# Altium PCB HYDRA_V4_LINK.PcbDoc
Units mm, origin at the board's own origin, x right, y up, seen from the top; angles counter-clockwise.
Board outline 50.1 x 45.1 mm, 4 copper layers (TOP SIG, PWR + INT SIG, GND, BOTTOM SIG), stack 1.586 mm thick; 83 components, 114 nets, 317 pads, 40 vias.
Unrouted connection lines stored in the file: 161.
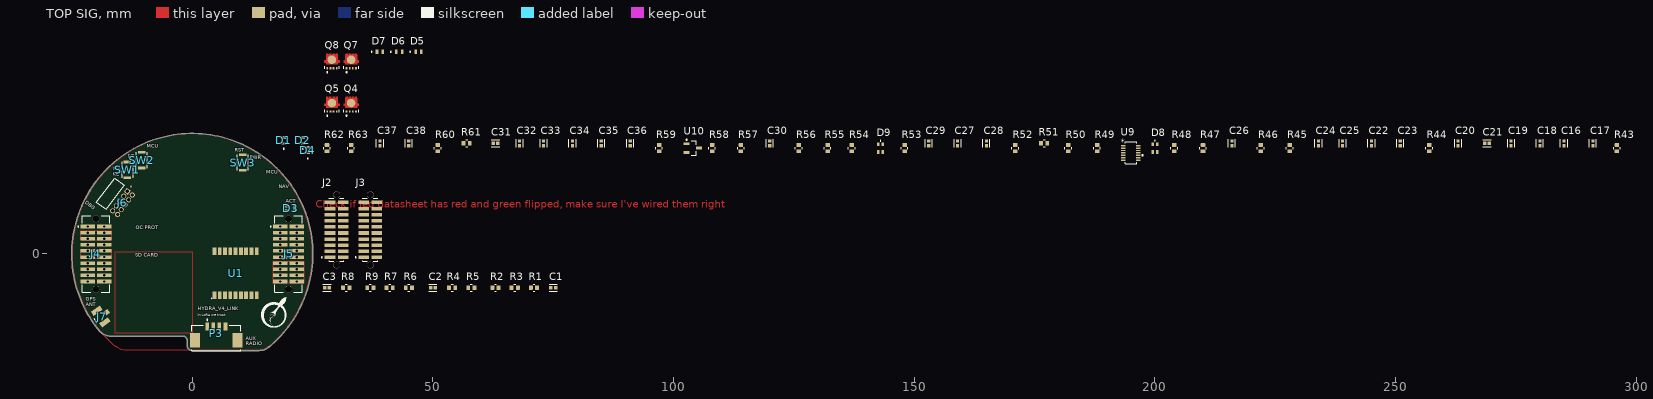
[diagram p0: TOP SIG view]
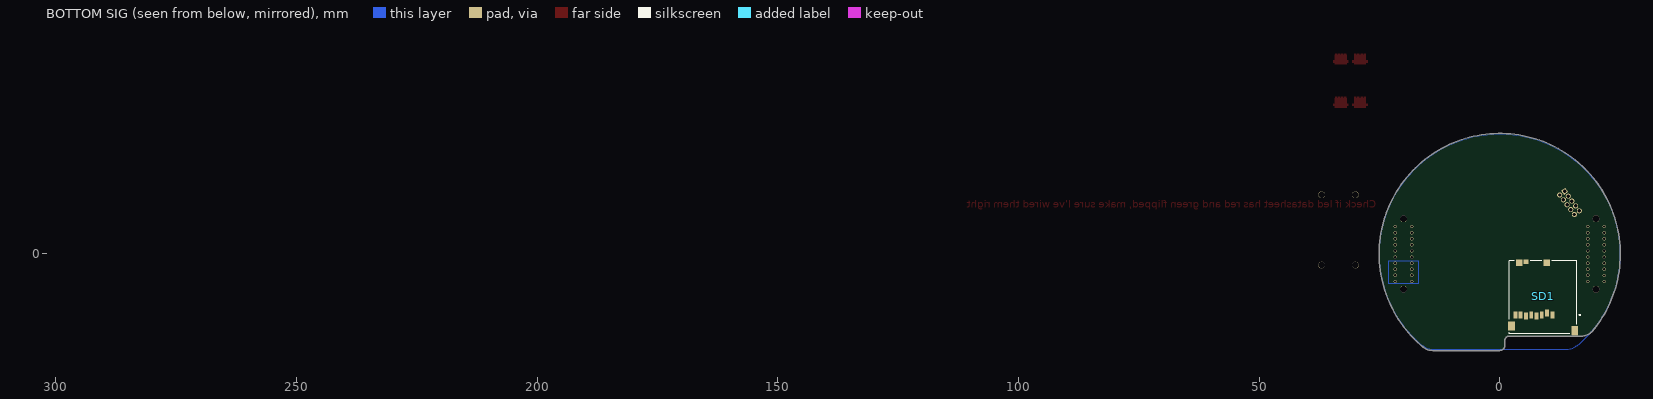
[diagram p1: BOTTOM SIG view, seen from below]
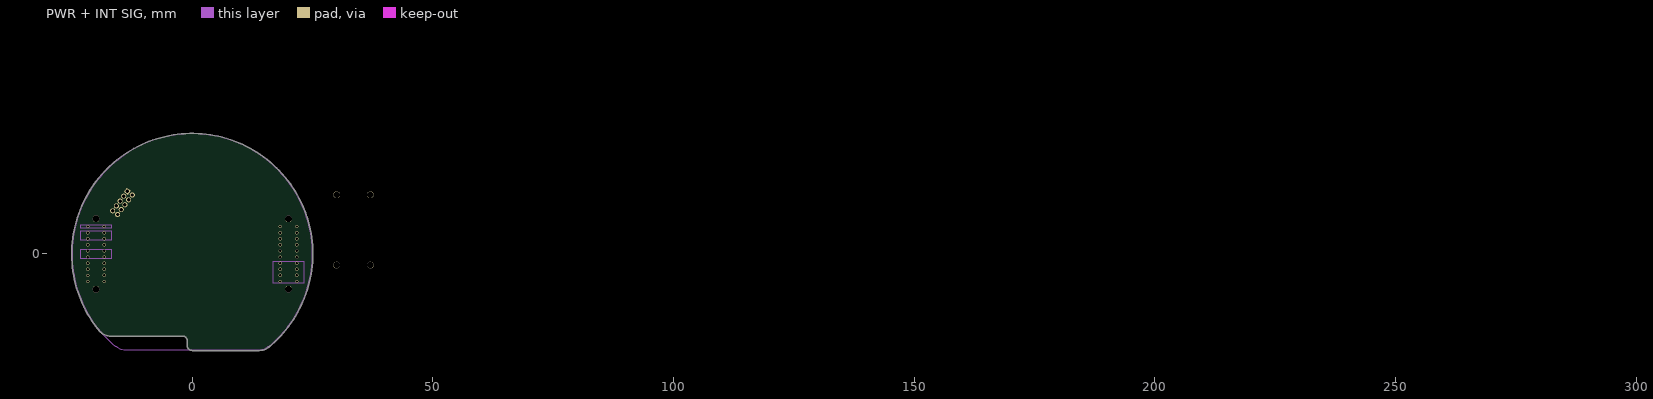
[diagram p2: PWR + INT SIG]
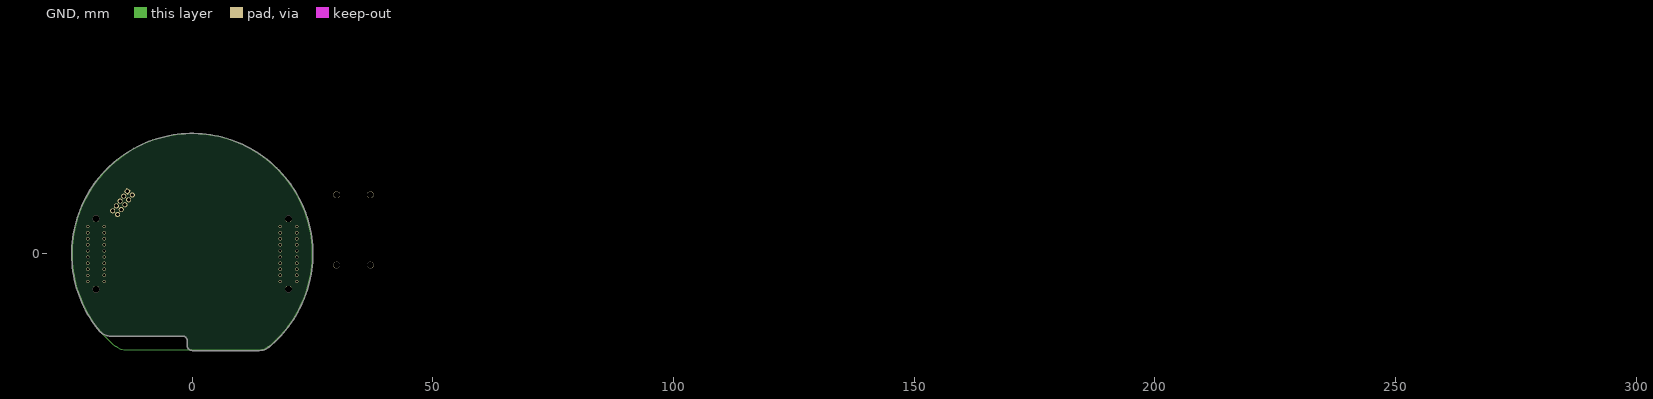
[diagram p3: GND]

## Layer stack, top to bottom
Top Solder: solder mask 0.0127, Solder Resist, Dk 3.8
TOP SIG: signal copper 0.035
Dielectric 1: prepreg 0.2104, 7628, Dk 4.6
PWR + INT SIG: signal copper 0.0152
Core: core 1.065, FR-4, Dk 4.5
GND: signal copper 0.0152
Dielectric 2: prepreg 0.2104, 7628, Dk 4.6
BOTTOM SIG: signal copper 0.035
Bottom Solder: solder mask 0.0127, Solder Resist, Dk 3.8

## Board outline
-17.004,-17.05 -2,-17.05 cw(c-2,-18) -1.05,-18 -1.05,-19 ccw(c0,-19) 0,-20.05 13.96,-20.05 13.961,-20.05 ccw(c13.96,-17) 15.886,-19.366 15.9,-19.357 ccw(c0,0) 25.05,0 ccw(c0,0) -19.19,-16.102 -19.165,-16.118 ccw(c-16.97,-14)

## Design rules (kind name [scope] priority, off if disabled: settings)
BoardOutlineClearance [All] p1: gap=0.2 ignorepadtopadclearanceinfootprint=FALSE
Clearance [All] p1: gap=0.102 ignorepadtopadclearanceinfootprint=FALSE except(0.127: Arc-Via Track-Via SMDPad-Via THPad-Via Via-Via Via-Fill Via-Poly Via-Region Via-Text; 0.25: Arc-Hole Track-Hole SMDPad-Hole THPad-Hole Via-Hole Fill-Hole Poly-Hole Region-Hole Text-Hole)
ComponentClearance [All] p1: gap=0.102 collisioncheckmode=3 verticalgap=0.102 showdistances=TRUE
DiffPairsRouting [All] p1: maxlimit=0.102 minlimit=0.102 mostfreqgap=0.102 toplayer_minwidth=0.102 toplayer_maxwidth=1816.048 toplayer_prefwidth=0.102 midlayer1_minwidth=0.102 midlayer1_maxwidth=1816.048 midlayer1_prefwidth=0.102 midlayer2_minwidth=0.102 midlayer2_maxwidth=1816.048 midlayer2_prefwidth=0.102 bottomlayer_minwidth=0.102 bottomlayer_maxwidth=1816.048 bottomlayer_prefwidth=0.102 maxuncoupledlength=12.7
Height [All] p1: minheight=0 maxheight=1816.048 prefheight=12.7
HoleSize [All] p1: absolutevalues=TRUE maxlimit=6.3 minlimit=0.2 maxpercent=80.000 minpercent=20.000
HoleToHoleClearance [All] p1: gap=0.25 allowstackedmicrovias=FALSE
MinimumAnnularRing [All] p1: minimumring=0.076
MinimumSolderMaskSliver [All] p1: minsoldermaskwidth=0
PlaneClearance [All] p1: clearance=0.102
PlaneConnect PlaneConnectPowerPads [InPadClass('PowerPads')] p1: planeconnectstyle=Direct reliefexpansion=0.508 reliefentries=4 reliefconductorwidth=0.254 reliefairgap=0.254
PlaneConnect [All] p2: pad.planeconnectstyle=Relief pad.reliefexpansion=0.3 pad.reliefentries=4 pad.reliefconductorwidth=0.102 pad.reliefairgap=0.102 via.planeconnectstyle=Direct via.reliefexpansion=0.3 via.reliefentries=4 via.reliefconductorwidth=0.127 via.reliefairgap=0.127
PolygonConnect PolygonConnectPowerPads [All vs (InPadClass('PowerPads'))] p1: connectstyle=Direct reliefconductorwidth=0.254 reliefentries=4 polygonreliefangle="90 Angle" airgapwidth=0.254
PolygonConnect [All] p2: thpad.connectstyle=Relief thpad.reliefconductorwidth=0.102 thpad.reliefentries=4 thpad.polygonreliefangle="90 Angle" thpad.airgapwidth=0.102 smdpad.connectstyle=Direct smdpad.reliefconductorwidth=0.102 smdpad.reliefentries=4 smdpad.polygonreliefangle="90 Angle" smdpad.airgapwidth=0.102 via.connectstyle=Direct via.reliefconductorwidth=0.127 via.reliefentries=4 via.polygonreliefangle="90 Angle" via.airgapwidth=0.127
RoutingVias [All] p1: holewidth=0.2 width=0.45 viastyle="Through Hole" minholewidth=0.2 minwidth=0.45 maxholewidth=6.3 maxwidth=6.55
SilkToSilkClearance [All] p1: silktosilkclearance=0
SilkToSolderMaskClearance [IsPad] p1: minsilkscreentomaskgap=0.102 clearancetoexposedcopper=TRUE
SolderMaskExpansion [All] p1: expansion=0.075 istentingtop=FALSE
Width [All] p1: maxlimit=1816.048 minlimit=0.102 preferedwidth=0.102
Width Width_50SINGLE [InNetClass('50SINGLE')] p2: maxlimit=0.355 minlimit=0.264 preferedwidth=0.355 toplayer_minwidth=0.355 midlayer1_maxwidth=0.264 midlayer1_prefwidth=0.264 midlayer2_maxwidth=0.264 midlayer2_prefwidth=0.264 bottomlayer_minwidth=0.355 impedanceprofiledriven=TRUE impedanceprofileid={61503230-CAF7-4D86-9F86-0761DBFA93B6} impedanceprofilevalue=50.000000 minimp=50.000000 maximp=50.000000 favimp=50.000000
20 further rules are at their usual default settings.

## Classes and differential pairs
component class UPS: C5 C6 C7 C8 C9 C10 C11 C12 C13 C14 D3 D4 D5 D6 D7 L2 Q6 Q7 Q8 R16 R17 R18 R19 R20 R21 R22 R23 R24 R25 R26 R27 R28 R29 R30 R31 R32 R33 R34 R35 U4 U5 U6
component class SD: C15 R36 R37 R38 R39 R40 R41 R42 SD1
component class OC_PROT: C4 D1 D2 F2 Q4 Q5 R10 R11 R12 R13 R14 R15 U3
component class HYDRA_V4_LINK: F1 J1 J2 J3 J4 J5 P1 P2
component class GPS: C1 C2 C3 L1 Q1 Q2 Q3 R1 R2 R3 R4 R5 R6 R7 R8 R9 U1 U2
differential pair class 120DIFF: CAN0
component class MCU: C16 C17 C18 C19 C20 C21 C22 C23 C24 C25 C26 C27 C28 C29 C30 C31 C32 C33 C34 C35 C36 C37 C38 D8 D9 J6 R43 R44 R45 R46 R47 R48 R49 R50 R51 R52 R53 R54 R55 R56 R57 R58 R59 R60 R61 R62 R63 SW1 SW2 SW3 U9 U10
differential pair X: +X_P -X_N
differential pair X32: +X32_P -X32_N
differential pair CAN1: +CAN1_P -CAN1_N
differential pair CAN0: +CAN0_P -CAN0_N

## Components (designator, comment, footprint, x,y, rotation, side; value= is the part's Value field where it differs from the comment)
C1 "100n" FP-0402-L_1_0_0_05-W_0_5-IPC_A 75,-7 r0 top
C2 "10n" FP-0402-L_1_0_0_05-W_0_5-IPC_A 50,-7 r0 top
C3 "100n" FP-0402-L_1_0_0_05-W_0_5-IPC_A 28,-7 r0 top
C16 "4.7u" FP-0402-L_1_0_0_05-W_0_5-IPC_A 285,23 r90 top
C17 "100n" FP-0402-L_1_0_0_05-W_0_5-IPC_A 291,23 r90 top
C18 "100n" FP-0402-L_1_0_0_05-W_0_5-IPC_A 280,23 r90 top
C19 "100n" FP-0402-L_1_0_0_05-W_0_5-IPC_A 274,23 r90 top
C20 "1u" FP-0402-L_1_0_0_05-W_0_5-IPC_A 263,23 r90 top
C21 "100n" FP-0402-L_1_0_0_05-W_0_5-IPC_A 269,23 r0 top
C22 "1u" FP-0402-L_1_0_0_05-W_0_5-IPC_A 245,23 r90 top
C23 "100n" FP-0402-L_1_0_0_05-W_0_5-IPC_A 251,23 r90 top
C24 "1u" FP-0402-L_1_0_0_05-W_0_5-IPC_A 234,23 r90 top
C25 "100n" FP-0402-L_1_0_0_05-W_0_5-IPC_A 239,23 r90 top
C26 "100n" FP-0402-L_1_0_0_05-W_0_5-IPC_A 216,23 r90 top
C27 "100n" FP-0402-L_1_0_0_05-W_0_5-IPC_A 159,23 r90 top
C28 "100n" FP-0402-L_1_0_0_05-W_0_5-IPC_A 165,23 r90 top
C29 "100n" FP-0402-L_1_0_0_05-W_0_5-IPC_A 153,23 r90 top
C30 "100n" FP-0402-L_1_0_0_05-W_0_5-IPC_A 120,23 r90 top
C31 "6.8p" FP-0402-L_1_0_0_05-W_0_5-IPC_A 63,23 r0 top
C32 "6.8p" FP-0402-L_1_0_0_05-W_0_5-IPC_A 68,23 r90 top
C33 "18p" FP-0402-L_1_0_0_05-W_0_5-IPC_A 73,23 r90 top
C34 "18p" FP-0402-L_1_0_0_05-W_0_5-IPC_A 79,23 r90 top
C35 "100n" FP-0402-L_1_0_0_05-W_0_5-IPC_A 85,23 r90 top
C36 "10u" FP-0402-L_1_0_0_05-W_0_5-IPC_A 91,23 r90 top
C37 "100n" FP-0402-L_1_0_0_05-W_0_5-IPC_A 39,23 r90 top
C38 "100n" FP-0402-L_1_0_0_05-W_0_5-IPC_A 45,23 r90 top
D1 "TS4148RCG" TS4148RCG-Footprint-1 19,23.6 r90 top
D2 "TS4148RCG" TS4148RCG-Footprint-1 23,23.6 r90 top
D3 "150066RG54050" WL-SBCD_0606 20.5,9.5 r90 top locked
D4 "TS4148RCG" TS4148RCG-Footprint-1 24,21.6 r90 top
D5 "TS4148RCG" TS4148RCG-Footprint-1 47,42 r0 top
D6 "TS4148RCG" TS4148RCG-Footprint-1 43,42 r0 top
D7 "TS4148RCG" TS4148RCG-Footprint-1 39,42 r0 top
D8 "150066RG54050" WL-SBCD_0606 200,22 r0 top
D9 "150066RG54050" WL-SBCD_0606 143,22 r0 top
J2 "SFML-110-02-L-D-A" SFML-110-02-L-D-A-Footprint-1 30,5 r90 top
J3 "SFML-110-02-L-D-A" SFML-110-02-L-D-A-Footprint-1 37,5 r90 top
J4 "TFML-110-02-L-D-A" TFML-110-02-L-D-A-Footprint-1 -20,0 r270 top locked
J5 "TFML-110-02-L-D-A" TFML-110-02-L-D-A-Footprint-1 20,0 r270 top locked
J6 "FTSH-105-01-F-D-RA-K" FTSH-105-01-F-D-RA-K-Footprint-1 -15,11 r53 top locked
J7 "U.FL-R-SMT(10)" FP-U_FL-R-SMT_10-MFG -19,-13 r305 top
P3 "53261-0471" MOLEX-53261-0471_V 5,-16.5 r0 top
Q4 "SISH615ADN-T1-GE3" SISH615ADN-T1-GE3-Footprint-1 33,31 r0 top
Q5 "SISH615ADN-T1-GE3" SISH615ADN-T1-GE3-Footprint-1 29,31 r0 top
Q7 "SISH615ADN-T1-GE3" SISH615ADN-T1-GE3-Footprint-1 33,40 r0 top
Q8 "SISH615ADN-T1-GE3" SISH615ADN-T1-GE3-Footprint-1 29,40 r0 top
R1 "100k" R0603B 71,-7 r0 top
R2 "10 1%" R0603B 63,-7 r0 top
R3 "1k" R0603B 67,-7 r0 top
R4 "560 1%" R0603B 54,-7 r0 top
R5 "100k" R0603B 58,-7 r0 top
R6 "100k 1%" R0603B 45,-7 r0 top
R7 "100k" R0603B 41,-7 r0 top
R8 "1k" R0603B 32,-7 r0 top
R9 "10k" R0603B 37,-7 r0 top
R43 "10k" R0603B 296,22 r90 top
R44 "1k" R0603B 257,22 r90 top
R45 "100k" R0603B 228,22 r90 top
R46 "120" R0603B 222,22 r90 top
R47 "1k" R0603B 210,22 r90 top
R48 "100k" R0603B 204,22 r90 top
R49 "56" R0603B 188,22 r90 top
R50 "120" R0603B 182,22 r90 top
R51 "1k" R0603B 177,23 r0 top
R52 "10k" R0603B 171,22 r90 top
R53 "1k" R0603B 148,22 r90 top
R54 "100k" R0603B 137,22 r90 top
R55 "1k" R0603B 132,22 r90 top
R56 "56" R0603B 126,22 r90 top
R57 "56" R0603B 114,22 r90 top
R58 "10k" R0603B 108,22 r90 top
R59 "10k" R0603B 97,22 r90 top
R60 "330" R0603B 51,22 r90 top
R61 "330" R0603B 57,23 r0 top
R62 "10k" R0603B 28,22 r90 top
R63 "10k" R0603B 33,22 r90 top
SD1 "473521001" MOLX-473521001_V -9,-9 r180 bottom
SW1 "KXT331LHS" FP-KXT331LHS-MFG -13.5,17.5 r90 top locked
SW2 "KXT331LHS" FP-KXT331LHS-MFG -10.5,19.5 r90 top locked
SW3 "KXT331LHS" FP-KXT331LHS-MFG 10.5,19 r270 top locked
U1 "MAX-M10M-00B" MAX-M10M-00B-Footprint-1 9,-4 r90 top
U9 "TCAN1146DYYRQ1" TCAN1146DYYRQ1-Footprint-1 195,21 r0 top
U10 "AP7375-50SA-7" AP7375-50SA-7-Footprint-1 104,22 r0 top

## Footprints (in the part's own frame and the unit in brackets; to place one, negate y for a bottom-side part, rotate by r counter-clockwise, add the part's x,y. Pads: shape width x height; smd on the part's side, far side on the other; paste and mask are expansions set on the pad)
AP7375-50SA-7-Footprint-1 [mm]
  rect 1.2x0.6 smd: 1(-1.3,0.9) 2(-1.3,-0.9) 3(1.3,0)
  silkscreen extent -1.42,-1.5 0.7,1.87, body extent -0.7,-1.5 0.7,1.5, height 1.1
FP-0402-L_1_0_0_05-W_0_5-IPC_A [mm]
  rect 0.715x0.672 smd paste+0 mask+0: 1(-0.479,0) 2(0.479,0)
  silkscreen extent -0.84,-0.74 0.84,0.74, body extent -1.04,-0.54 1.04,0.54, height 0.25
FP-KXT331LHS-MFG [mm]
  rect 0.55x1.5 smd paste+0 mask+0: 1(-1.625,0) 2(1.625,0)
  silkscreen extent -1.65,-1.15 1.65,1.15, body extent -2,-1.25 2,1.25, height 0.25
FP-U_FL-R-SMT_10-MFG [mm]
  rect 1x1.05 smd paste-1000 mask+0: 1(0,1.525)
  rect 1.05x2.2 smd paste-1000 mask+0: 2(-1.475,0) 3(1.475,0)
  silkscreen extent -0.58,-1.38 0.57,-1.38, body extent -2.1,-1.48 2.1,2.15, height 0.25
FTSH-105-01-F-D-RA-K-Footprint-1 [mm]
  rect 1.06x1.06 hole 0.71: 01(2.54,0)
  round 1.06 hole 0.71: 02(2.54,-1.27) 03(1.27,0) 04(1.27,-1.27) 05(0,0) 06(0,-1.27) 07(-1.27,0) 08(-1.27,-1.27) 09(-2.54,0) 10(-2.54,-1.27)
  silkscreen extent -3.13,-0.1 3.88,3.78, body extent -3.14,-1.54 3.14,6.92, height 5.04
MAX-M10M-00B-Footprint-1 [mm]
  rect 1.55x0.8 smd: 1(-4.6,4.4) 2(-4.6,3.3) 3(-4.6,2.2) 4(-4.6,1.1) 5(-4.6,0) 6(-4.6,-1.1) 7(-4.6,-2.2) 8(-4.6,-3.3) 9(-4.6,-4.4) 10(4.6,-4.4) 11(4.6,-3.3) 12(4.6,-2.2) 13(4.6,-1.1) 14(4.6,0) 15(4.6,1.1) 16(4.6,2.2) 17(4.6,3.3) 18(4.6,4.4)
  silkscreen extent -5.26,4.91 -5.16,5.01, body extent -4.85,-5.35 4.85,5.05, height 2.7
MOLEX-53261-0471_V [mm] "SMD, 4-Leads, Body 10.15x5.2mm, Pitch 1.25mm"
  rect 0.8x1.6 smd: 1(-1.875,1.45) 2(-0.625,1.45) 3(0.625,1.45) 4(1.875,1.45)
  rect 2.1x3 smd: MP1(-4.425,-1.45) MP2(4.425,-1.45)
  silkscreen extent -5.08,-3.55 5.08,2.93, body extent -5.08,-3.55 5.07,1.65, height 3.4
MOLX-473521001_V [mm] "SMD, 8-Leads, Body 15.2x14mm, Pitch 1.1mm"
  rect 0.8x1.5 smd: 1(1.94,-3.66) 2(0.84,-3.26) 3(-0.26,-3.66) 4(-1.36,-3.86) 5(-2.46,-3.66) 6(-3.56,-3.86) 7(-4.66,-3.66) 8(-5.76,-3.66)
  rect 1x0.95 smd: 9(-3.56,7.425)
  rect 1.3x1.4 smd: 10(-4.95,7.2) 11(0.75,7.2)
  rect 1.4x1.9 smd: 12(6.6,-6.95) 13(-6.55,-5.95)
  silkscreen extent -7,-7.6 7.77,7.6, body extent -7.05,-7.6 7.05,7.6, height 1.85
R0603B [mm] "Chip Resistor, 0603, 2-Leads, Body 1.58x0.85mm, IPC Medium Density"
  rrect25% 0.8x0.95 smd: 1(-0.65,0) 2(0.65,0)
  silkscreen extent -0.2,-0.7 0.2,0.7, body extent -0.82,-0.48 0.82,0.48, height 0.5
SFML-110-02-L-D-A-Footprint-1 [mm]
  rect 0.74x2.22 smd: 01(-5.715,1.365) 02(-5.715,-1.365) 03(-4.445,1.365) 04(-4.445,-1.365) 05(-3.175,1.365) 06(-3.175,-1.365) 07(-1.905,1.365) 08(-1.905,-1.365) 09(-0.635,1.365) 10(-0.635,-1.365) 11(0.635,1.365) 12(0.635,-1.365) 13(1.905,1.365) 14(1.905,-1.365) 15(3.175,1.365) 16(3.175,-1.365) 17(4.445,1.365) 18(4.445,-1.365) 19(5.715,1.365) 20(5.715,-1.365)
  round 1.4 hole 1.4 unplated: ""(-7.305,0) ""(7.305,0)
  silkscreen extent -6.54,-1.53 6.54,3.17, body extent -7.94,-2.04 7.94,2.16, height 4.57
SISH615ADN-T1-GE3-Footprint-1 [mm]
  rect 0.35x0.5 smd paste+0 mask+0: 1(-0.937,-1.4) 2(-0.288,-1.4) 3(0.363,-1.4) 4(1.012,-1.4)
  round 1.769 smd paste+0 mask+0: 5-6-7-8(0,0.367)
  TOP SIG region: -1.187,-0.63 -1.187,-0.215 -1.568,-0.215 -1.568,0.215 -1.187,0.215 -1.187,1.35 -1.137,1.35 -1.137,1.65 -0.737,1.65 -0.737,1.35 -0.487,1.35 -0.487,1.65 -0.088,1.65 -0.088,1.35 0.163,1.35 0.163,1.65 0.563,1.65 0.563,1.35 0.813,1.35 0.813,1.65 1.212,1.65 1.212,1.35 1.262,1.35 1.262,0.215 1.643,0.215 1.643,-0.215 1.262,-0.215 1.262,-0.63
  silkscreen extent -1.51,-2.37 1.59,-1.01, body extent -1.67,-1.75 1.74,1.75, height 0.25
TCAN1146DYYRQ1-Footprint-1 [mil]
  rect 38.5x12 smd paste+0 mask+0: 1(-60.75,59.07) 2(-60.75,39.38) 3(-60.75,19.69) 4(-60.75,0) 5(-60.75,-19.69) 6(-60.75,-39.38) 7(-60.75,-59.07) 8(60.75,-59.07) 9(60.75,-39.38) 10(60.75,-19.69) 11(60.75,0) 12(60.75,19.69) 13(60.75,39.38) 14(60.75,59.07)
  silkscreen extent -46,-90 100,90, body extent -66,-84 66,84, height 43
TFML-110-02-L-D-A-Footprint-1 [mm]
  rect 0.74x2.92 smd: 01(-5.715,-1.715) 02(-5.715,1.715) 03(-4.445,-1.715) 04(-4.445,1.715) 05(-3.175,-1.715) 06(-3.175,1.715) 07(-1.905,-1.715) 08(-1.905,1.715) 09(-0.635,-1.715) 10(-0.635,1.715) 11(0.635,-1.715) 12(0.635,1.715) 13(1.905,-1.715) 14(1.905,1.715) 15(3.175,-1.715) 16(3.175,1.715) 17(4.445,-1.715) 18(4.445,1.715) 19(5.715,-1.715) 20(5.715,1.715)
  round 1.4 hole 1.4 unplated: ""(-7.305,0) ""(7.305,0)
  silkscreen extent -7.94,-3.8 7.94,2.86, body extent -7.94,-2.92 7.94,2.92, height 5.59
TS4148RCG-Footprint-1 [mm]
  rect 0.55x0.9 smd: A(0.6,0) C(-0.6,0)
  silkscreen extent -1.85,-0.1 -1.65,0.1
WL-SBCD_0606 [mm] "SMT Bi-color Chip LED Diffuesed, body 1.5x1.6mm"
  rect 0.5x0.8 smd: 1(-0.45,0.8) 2(-0.45,-0.8) 3(0.45,-0.8) 4(0.45,0.8)
  silkscreen extent -0.07,1.47 0.07,1.62, body extent -0.75,-0.8 0.75,0.8, height 0.55

## Part data
C1 C2 C3 C16 C17 C18 C19 C20 C21 C22 C23 C24 C25 C26 C27 C28 C29 C30 C31 C32 C33 C34 C35 C36 C37 C38: library part CMP-001-00058-1, "LARGE PADS, 0402 CAP, CHANGE COMMENT TO MATCH REAL P/N", Capacitor Type=Ceramic, Case/Package=0402, Max Operating Temperature=85°C, Min Operating Temperature=-55°C, Mounting Technology="Surface Mount", Pins=2, RoHS Compliant=Yes
D1 D2 D4 D5 D6 D7: library part CMP-004-00036-1, "SMD Si-Diode 75V 100mA 0603"
D3: library part CMP-004-00034-2, "Led, Red/Grn, 180Mcd/230Mcd, 624Nm/525Nm Rohs Compliant: Yes"
D8 D9: library part CMP-004-00040-2, "Led, Red/Grn, 180Mcd/230Mcd, 624Nm/525Nm Rohs Compliant: Yes", Component Type=Standard, Design Item ID=CMP-004-00034-2, Pins=4, Source=rgled.SchLib
J2 J3: library part CMP-002-00043-1, "Board Connector, 20 Contact(s), 2 Row(s), Female, Straight, 0.05 inch Pitch, Surface Mount Terminal, Locking, Black Insulator, Socket", Connector Type="BOARD CONNECTOR", Mounting Technology=Board, RoHS Compliant=Yes
J4 J5: library part CMP-002-00042-1, "Board Connector, 20 Contact(s), 2 Row(s), Male, Straight, Surface Mount Terminal", Connector Type="BOARD CONNECTOR", Mounting Technology=Board, RoHS Compliant=Yes
J6: library part CMP-002-00041-5, "Board Connector, 10 Contact(s), 2 Row(s), Male, Right Angle, 0.05 inch Pitch, Surface Mount Terminal, Locking, Black Insulator", Connector Type="BOARD CONNECTOR", Mounting Technology=Board, RoHS Compliant=Yes
J7: library part CMP-0029-00003-2, "CONN U.FL RCPT STR 50 OHM SMD", Case/Package=SMD/SMT, Dielectric Material=Polymer, Frequency=6GHz, Housing Color=Beige, Max Operating Temperature=90°C, Min Operating Temperature=-40°C, Package Quantity=1, Body Material=Bronze, Body Plating=Silver, Connector Type=Coaxial, Contact Material=Brass, Contact Plating=Gold, Depth=3.1mm, Fastening Type=Snap, Impedance=50R, Lead Free="Lead Free", Length=3mm, Max Frequency=6GHz, Mount="Surface Mount", Orientation=Vertical, Packaging="Tape and Reel", Plating=Silver, Radiation Hardening=No, Termination=Solder
P3: library part CMP-2000-05238-1, "Male Header, Pitch 1.25 mm, 1 x 4 Position, Height 3.4 mm, -40 to 85 degC, RoHS, Tape and Reel", Current Rating=1A, Manufacturer=Molex, Package Description="1.25mm Pitch PicoBlade(TM) Header, Surface Mount, Right Angle, Lead-Free, 4 Circuits", Voltage Rating=125V, Brand=Molex, Contact Material=PhosphorBronze, Contact Plating=Tin, Datasheet URL=http://www.molex.com/pdm_docs/sd/532610471_sd.pdf, Datasheet Version="Rev. G, 01/2012", Factory Pack Quantity=1000, Housing Material=Thermoplastic, Manufacturer URL=http://www.molex.com/, Mounting Angle=Right, Mounting Style=SMD/SMT, Number of Positions=4, Number of Positions / Contacts=4, Number Of Rows=1, Packaging=Reel, Pitch=1.25mm, Product Category=Headers&WireHousings, Product Type=Headers, RoHS=Details, Series=53261, Termination Style=SMD, Tradename=PicoBlade, Type=Shrouded
Q4 Q5 Q7 Q8: library part CMP-013-00036-1, "Trans MOSFET P-CH 20V 22.1A 8-Pin PowerPAK 1212 EP T/R"
R1 R2 R3 R4 R5 R6 R7 R8 R9 R43 R44 R45 R46 R47 R48 R49 R50 R51 R52 R53 R54 R55 R56 R57 R58 R59 R60 R61 R62 R63: library part CMP-009-00002-14, "Resistor"
SD1: library part CMP-2000-05848-1, "MicroSD(TM), Pitch 1.1 mm, 8 Position, Height 1.88 mm, -20 to 85 degC, RoHS, Tape and Reel", Manufacturer=Molex, Package Description="MicroSD(TM), Pitch 1.1 mm, 8 Position, Height 1.88 mm", Datasheet URL=http://www.molex.com/pdm_docs/sd/473521001_sd.pdf, Datasheet Version="Rev. G, 01/2012", Manufacturer URL=http://www.molex.com/, Mounting Technology=SurfaceMount, Package Reference=473521001
SW1 SW2 SW3: library part CMP-10040-000029-1, "SWITCH TACTILE SPST-NO 0.02A 15V", Current Rating=5A, Flammability Rating="UL94 V-0", Insulation Color=Black, Max Operating Temperature=85°C, Min Operating Temperature=-40°C, Operating Force=240gf, Actuator Type=Standard, Connector Type=USB, Contact Plating=Gold, Gender=Receptacle, Illumination Type=Non-Illuminated, Mechanical Life=500000Cycles, Mount="Surface Mount", Number Of Contacts=24, Number of Ports=1, Packaging="Tape and Reel", Switch Function=Off-Mom, Switch Travel=0.13mm, Termination=Solder, Throw Configuration=SPST
U1: library part CMP-010-00031-1, "Gnss Lcc Rx Mod, Rom, Crystal"
U9: library part CMP-318-000000-2, "Automotive CAN FD transceiver with watchdog, bus diagnostics and partial networking via sele 14-SOT-23-THIN -40 to 150", Component Type=Standard, Design Item ID=CMP-015-00012-2, Pin Count=14, Source=TCAN1146DYYRQ1.SchLib
U10: library part CMP-019-00041-1, "Ldo Cmos Lowcurr SOT23 T&r 3K"

## Via types
v1: diameter 0.7, hole 0.5, TOP SIG to BOTTOM SIG, 40 vias

## Nets (pads, with @x,y where several pads share a name; then routed paths per layer and width w, separated by ;. In a path a pad name is that pad's centre, name@x,y a point inside that pad or via, vN(x,y) a via of type N, cw(c..) or ccw(c..) an arc to the next point about the centre after c; other vN are vias at no path point)
3V3: C3.1 C16.1 C17.1 C18.1 C19.1 C22.1 C23.1 C26.1 C29.1 C37.2 J6.01 Q8.5-6-7-8 R7.2 R43.2 R49.2 R56.2 R57.2 R63.1 SD1.4 SW2.2 U9.5
3V3_CUTOFF_MOSFET: D1.C D2.C Q4.4 Q5.4
3V3_OC_TP: D1.A
3V3_POST_SHUNT: Q4.5-6-7-8
3V3_PRE_SHUNT: J2.09 J2.10 J2.11 J2.12 J4.09 J4.10 J4.11 J4.12
  other v1: -21.715,-0.635 -18.285,-0.633 -21.715,0.635 -18.285,0.635
5V: 
5V_INT: C27.1 C36.1 R58.2 U9.3 U10.2
ANT_DETECT: R8.1 U1.7
ANT_SENSE: R4.2 R6.1
ANT_SHORT_N: C2.1 R2.2 U1.8
BATT_DISABLE: D7.A
BATT_ENABLE: D6.A
BATT_PWR_MOSFET: Q7.4 Q8.4
BATT_SENSE: 
BATT_TS: 
BOOT: C37.1 R60.1 R62.2
BUZZ+: 
BUZZ-: 
CAN0_N: J2.16 J4.16 R50.1 U9.12
  other v1: -18.285,-3.175
CAN0_P: J2.15 J4.15 R50.2 U9.13
  other v1: -21.715,-3.175
CAN1_N: J2.20 J4.20 R46.1
  other v1: -18.285,-5.715
CAN1_P: J2.19 J4.19 R46.2
  other v1: -21.715,-5.715
CAN1_RX: U9.4
CAN1_TX: U9.1
CAN3_RX: 
CAN3_TX: 
CAN_INH: R53.2 U9.7
CAN_MISO: U9.6
CAN_MOSI: U9.11
CAN_nCS: U9.14
CAN_SCLK: U9.8
CHG_N: D3.4
DISABLE_HYDRA_POWER: 
EMAG_OUT: 
EMAG_TRIP: R47.2
GND: C1.2 C2.2 C3.2 C16.2 C17.2 C18.2 C19.2 C20.2 C21.2 C22.2 C23.2 C24.2 C25.2 C26.2 C27.2 C28.2 C29.2 C30.2 C31.2 C32.2 C33.2 C34.2 C35.2 C36.2 C38.2 D8.1 D8.4 J2.07 J2.08 J2.13 J2.14 J2.17 J2.18 J3.01 J3.02 J3.03 J3.04 J3.05 J3.06 J3.07 J3.08 J3.09 J3.10 J3.11 J3.12 J4.07 J4.08 J4.13 J4.14 J4.17 J4.18 J5.01 J5.02 J5.03 J5.04 J5.05 J5.06 J5.07 J5.08 J5.09 J5.10 J5.11 J5.12 J6.03 J6.05 R5.2 R6.2 R48.1 R59.1 R62.1 SD1.6 SD1.10 SD1.11 SD1.12 SD1.13 SW1.2 SW3.2 U1.1 U1.3 U1.10 U9.2 U10.3
  other v1: -21.715,-4.475 -18.285,-4.445 -18.285,-1.933 -21.715,-1.905 18.285,-0.635 21.715,-0.635 18.285,0.635 21.715,0.635 -21.715,1.905 -18.285,1.905 18.285,1.905 21.715,1.905 18.285,3.175 21.715,3.175 18.285,4.445 21.715,4.445 18.285,5.715 21.715,5.715
GPS_nENABLE: R9.1
GPS_nRESET: U1.18
GPS_PWR: C1.1 U1.16 U1.17
GPS_RF_IN: U1.2
GPS_RXD: U1.12
GPS_TXD: U1.11
HYDRA_3V3_SENSE: 
INT_3V3: Q7.5-6-7-8
INT_3V3_SENSE: 
INT_5V_SENSE: R58.1 R59.2
INT_VCC: R45.2
LNA_EN: R3.1 U1.4
LORA_MISO: SD1.7
LORA_MOSI: SD1.3
LORA_SCLK: SD1.5
MCU_G_LED: D9.1
MCU_R_LED: D9.4
NetC4_1: 
NetC12_1: 
NetC13_1: 
NetC28_1: C28.1 R52.2 U9.10
NetC30_1: C30.1 R52.1 R55.1 SW1.1
NetD2_A: D2.A
NetD3_2: D3.2
NetD3_3: D3.3
NetD4_A: D4.A D5.C
NetD4_C: D4.C D6.C
NetD5_A: D5.A
NetD7_C: D7.C
NetD8_2: D8.2 R49.1
NetD8_3: D8.3 R51.1
NetD9_2: D9.2 R56.1
NetD9_3: D9.3 R57.1
NetF2_2: 
NetF3_1: 
NetL2_1: 
NetL2_2: 
NetQ1_1: R1.2
NetQ1_3: R2.1 R4.1
NetQ2_1: R3.2 R5.1
NetQ3_1: R7.1 R9.2
NetQ4_1: Q4.1 Q4.2 Q4.3 Q5.1 Q5.2 Q5.3
NetQ5_5-6-7-8: Q5.5-6-7-8
NetQ6_3: 
NetQ7_1: Q7.1 Q7.2 Q7.3 Q8.1 Q8.2 Q8.3
NetQ9_1: R44.1 R45.1
NetQ10_1: R47.1 R48.2
NetQ10_3: R44.2
NetQ11_1: R53.1 R54.1
NetQ11_3: R51.2
NetR8_2: R8.2
NetR17_1: 
NetR19_1: 
NetR22_1: 
NetR25_2: 
NetR29_1: 
NetR55_2: R55.2 U9.9
NetR60_2: R60.2 SW2.1
NetR61_2: R61.2 SW3.1
PG_N: D3.1
PRE_5V: J2.03 J2.04 J2.05 J2.06 J4.03 J4.04 J4.05 J4.06
  other v1: -21.715,3.175 -18.285,3.175 -21.715,4.445 -18.285,4.445
PRE_V_BATT: 
PYRO_PWR: J3.13 J3.14 J3.15 J3.16 J3.17 J3.18 J3.19 J3.20 J5.13 J5.14 J5.15 J5.16 J5.17 J5.18 J5.19 J5.20
  other v1: 18.285,-5.715 21.715,-5.715 18.285,-4.445 21.715,-4.445 18.285,-3.175 21.715,-3.175 18.285,-1.905 21.715,-1.905
RESETN: C38.1 J6.10 R61.1 R63.2
SD_CD: SD1.9
SD_CS: SD1.2
SD_DAT_PULL_UP: SD1.1 SD1.8
SWCLK: J6.04 R43.1
SWDIO: J6.02
SWO: J6.06
V_BATT: 
VCC: C35.1 J2.01 J2.02 J4.01 J4.02 R54.2 U10.1
  other v1: -21.715,5.715 -18.285,5.715
VCC_RF: R1.1 U1.5
VDDA: C20.1 C21.1 C24.1 C25.1
X32_N: C34.1
X32_P: C33.1
X_N: C31.1
X_P: C32.1
pads on no net: J2. J3. J4. J5. J6.07 J6.08 J6.09 J7.1 J7.2 J7.3 P3.1 P3.2 P3.3 P3.4 P3.MP1 P3.MP2 U1.6 U1.9 U1.13 U1.14 U1.15

## Polygon pours and split planes (outlines as drawn)
no net on TOP SIG "NONET_L01_P026" (solid, pour order 26): -16,-16.5 -16,0.5 0,0.5 0,-16.5
GND on TOP SIG "NONET_L01_P022" (solid, remove dead copper, shelved, pour order 22): -15.806,-19.201 ccw(c-13.96,-17) -13.96,-19.873 13.96,-19.873 ccw(c13.96,-17) 15.806,-19.201 cw(c15.888,-19.298) 15.949,-19.186 ccw(c0,0) 24.95,0 ccw(c0,0) -15.949,-19.186 cw(c-15.888,-19.298)
PRE_5V on TOP SIG "NONET_L01_P003" (solid, remove dead copper, shelved, pour order 3): -23.175,4.815 -16.825,4.815 -16.825,2.805 -23.175,2.805
3V3_PRE_SHUNT on TOP SIG "NONET_L01_P007" (solid, remove dead copper, shelved, pour order 7): -23.175,1.005 -16.825,1.005 -16.825,-1.005 -23.175,-1.005
no net on TOP SIG "NONET_L01_P024" (solid, remove dead copper, shelved, pour order 24): 16.825,-1.55 23.175,-1.55 23.175,-6.1 16.825,-6.1
GND on PWR + INT SIG "NONET_L02_P012" (solid, remove dead copper, shelved, pour order 12): -15.806,-19.201 ccw(c-13.96,-17) -13.96,-19.873 13.96,-19.873 ccw(c13.96,-17) 15.806,-19.201 cw(c15.888,-19.298) 15.949,-19.186 ccw(c0,0) 24.95,0 ccw(c0,0) -15.949,-19.186 cw(c-15.888,-19.298)
PYRO_PWR on PWR + INT SIG "NONET_L02_P011" (solid, remove dead copper, shelved, pour order 11): 16.825,-1.55 23.175,-1.55 23.175,-6.1 16.825,-6.1
3V3_PRE_SHUNT on PWR + INT SIG "NONET_L02_P010" (solid, remove dead copper, shelved, pour order 10): -23.175,1.005 -16.825,1.005 -16.825,-1.005 -23.175,-1.005
PRE_5V on PWR + INT SIG "NONET_L02_P009" (solid, remove dead copper, shelved, pour order 9): -23.175,4.815 -16.825,4.815 -16.825,2.805 -23.175,2.805
VCC on PWR + INT SIG "NONET_L02_P008" (solid, remove dead copper, shelved, pour order 8): -23.175,6.085 -16.825,6.085 -16.825,5.345 -23.175,5.345
GND on BOTTOM SIG "NONET_L04_P020" (solid, remove dead copper, shelved, pour order 20): -15.806,-19.201 ccw(c-13.96,-17) -13.96,-19.873 13.96,-19.873 ccw(c13.96,-17) 15.806,-19.201 cw(c15.888,-19.298) 15.949,-19.186 ccw(c0,0) 24.95,0 ccw(c0,0) -15.949,-19.186 cw(c-15.888,-19.298)
no net on BOTTOM SIG "NONET_L04_P025" (solid, remove dead copper, shelved, pour order 25): 16.825,-1.55 23.175,-1.55 23.175,-6.1 16.825,-6.1
GND on GND "NONET_L03_P015" (solid, remove dead copper, shelved, pour order 15): -15.806,-19.201 ccw(c-13.96,-17) -13.96,-19.873 13.96,-19.873 ccw(c13.96,-17) 15.806,-19.201 cw(c15.888,-19.298) 15.949,-19.186 ccw(c0,0) 24.95,0 ccw(c0,0) -15.949,-19.186 cw(c-15.888,-19.298)

## Other copper
TOP SIG:
  text "Check if led datasheet has red and green flipped, make sure I've wired them right" at 25.625,9.65 h1.52

## Silkscreen, mask and mechanical layers (free items; w line width, h text height)
Top Overlay:
  region: 980 vertices and 2 holes, not listed, extent 14.33,-15.265 19.53,-8.999
  text "MCU" at -9.44,22.066 h0.75
  text "RST" at 8.85,21.25 h0.75
  text "BT" at -13.35,19.9 h0.75
  text "PWR" at 11.95,19.65 h0.75
  text "MCU" at 15.35,16.65 h0.75
  text "WA / KE" at -16.5,16.3 h0.75
  text "NAV" at 17.95,13.65 h0.75
  text "ACT" at 19.45,10.65 h0.75
  text "DBG" at -22.29,10.53 h0.75 r323
  text "OC PROT" at -11.749,5.1 h0.75
  text "SD CARD" at -11.799,-0.525 h0.75
  text "GPS / ANT" at -22.125,-10.825 h0.75
  text "HYDRA_V4_LINK" at 1.15,-11.725 h0.75
  text "In LoRa we trust" at 1.1,-12.9 h0.5
  text "AUX / RADIO" at 11.163,-19 h0.75
Mechanical 1:
  circle w0.1: c0,0 r27
  lines w0.15: -19.19,-16.102 cw(c0,0) 25.05,0 cw(c0,0) 15.9,-19.357 15.886,-19.366 cw(c13.96,-17) 13.961,-20.05 13.96,-20.05 0,-20.05 cw(c0,-19) -1.05,-19 -1.05,-18 ccw(c-2,-18) -2,-17.05 -17.004,-17.05 cw(c-16.97,-14) -19.165,-16.118 -19.19,-16.102

## Text inside footprints (layer, text, board x,y; h text height)
U9: Top 3D Body "*" at 194.01,21.8 h1.27; Top Overlay "*" at 192.886,22.678 h1.27